# Altium PCB PCB1.PcbDoc (part 6 of 7)
Units mm, origin at the board's own origin, x right, y up, seen from the top; angles counter-clockwise.
Board outline 100 x 70 mm, 6 copper layers (Top Layer 1, GND_1, SIG, VCC, GND_2, Bottom Layer 1), stack 0.816 mm thick; 462 components, 328 nets, 2208 pads, 873 vias.
Unrouted connection lines stored in the file: 175.
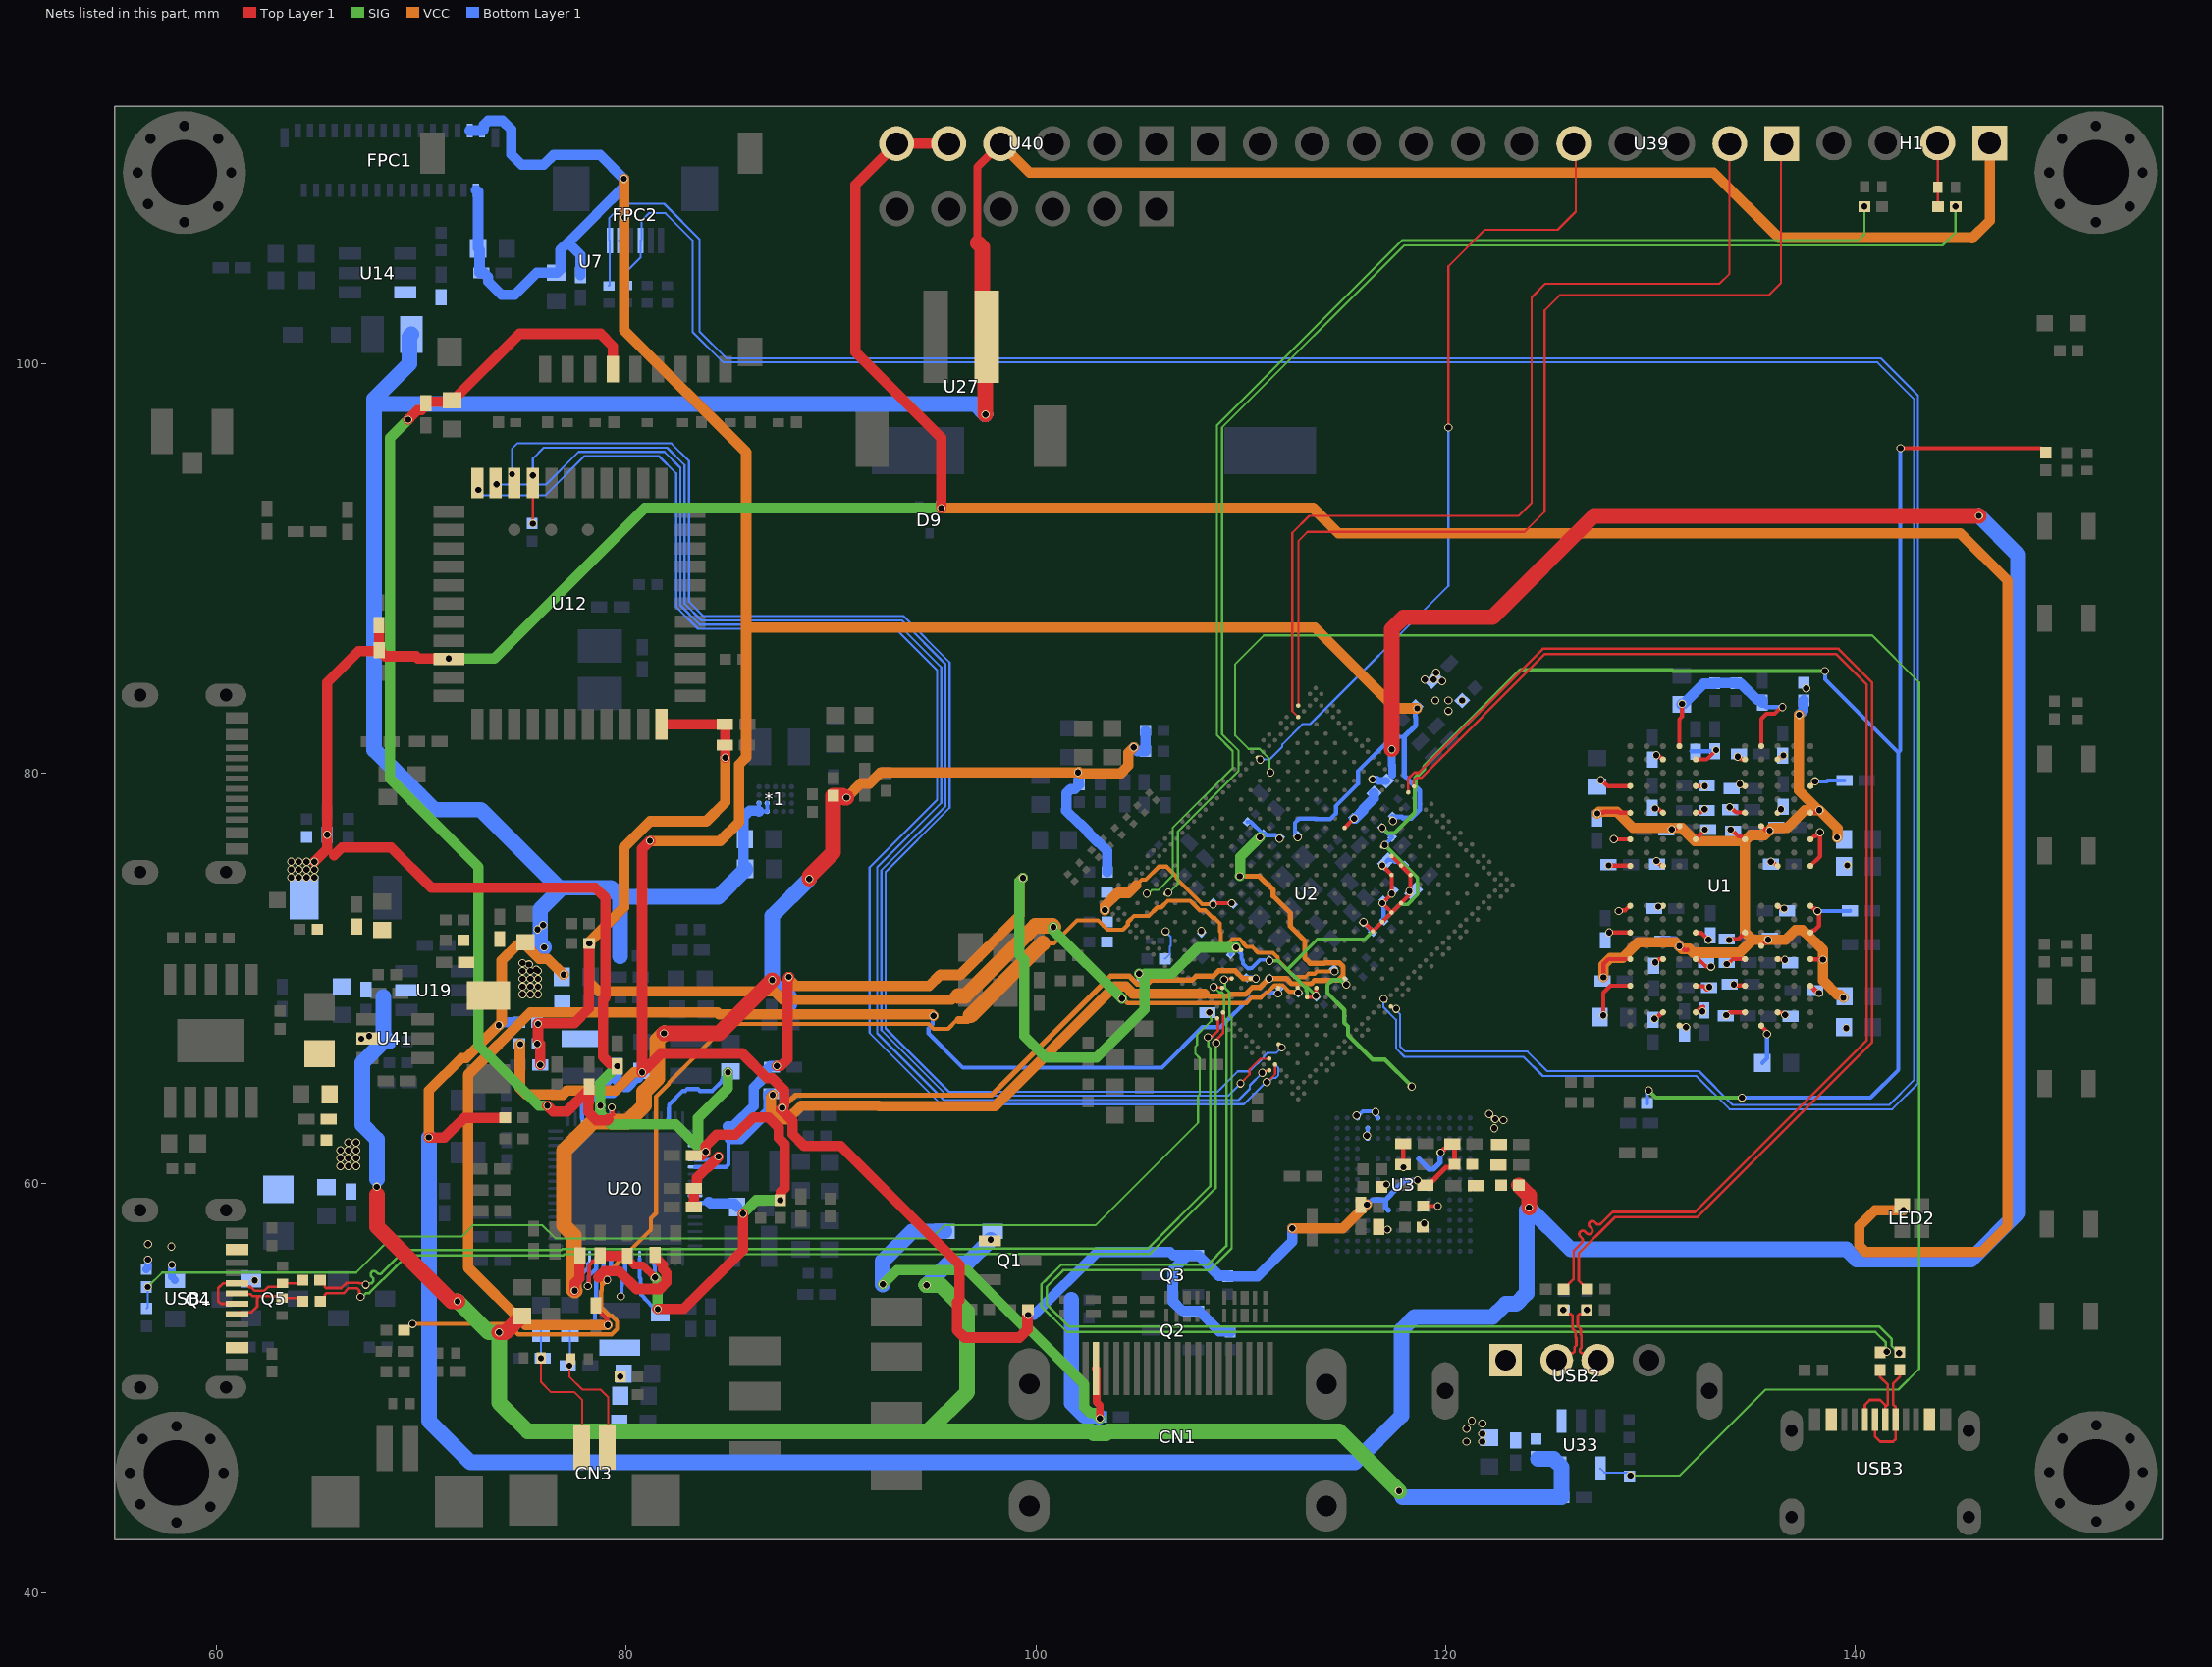
[diagram p10: the nets of this part, all layers, seen from the top]

## Via types
v1: diameter 0.4, hole 0.3, Top Layer 1 to Bottom Layer 1, tented both sides, 873 vias

## Nets (pads, with @x,y where several pads share a name; then routed paths per layer and width w, separated by ;. In a path a pad name is that pad's centre, name@x,y a point inside that pad or via, vN(x,y) a via of type N, cw(c..) or ccw(c..) an arc to the next point about the centre after c; other vN are vias at no path point) (continued)
SPI3_MOSI_M1: U2.AP12 U39.5 | length 39.2
  Top Layer 1 w0.102: U2.AP12@110.832,80.778 110.855,80.778 v1(110.949,80.684) ; v1(120.142,96.897) 120.142,104.775 121.92,106.553 125.476,106.553 126.365,107.442 126.365,110.66 U39.5@126.264,110.761
  Bottom Layer 1 w0.102: v1(110.949,80.684) 111.409,80.684 112.038,81.313 112.038,81.428 113.027,82.416 113.394,82.416 120.142,89.165 v1(120.142,96.897)
SPK_OUTN: C115.2 CN3.1 L9.1 U24.2 | length 7.2
  Top Layer 1 w0.102: v1(75.838,51.451) 75.838,50.273 76.327,49.784 77.47,49.784 77.851,49.403 77.851,47.134 CN3.1@77.819,47.102
  Bottom Layer 1 w0.102: L9.1@75.832,52.794 75.838,52.788 v1(75.838,51.451)
SPK_OUTP: C114.2 CN3.2 L8.1 U23.2 | length 7.5
  Top Layer 1 w0.102: U23.2@77.291,51.42 77.291,51.155 v1(77.218,51.082) 77.218,50.544 77.851,49.911 78.74,49.911 79.121,49.53 79.121,47.155 CN3.2@79.069,47.102
  Bottom Layer 1 w0.102: C114.2@77.15,51.071 77.162,51.082 v1(77.218,51.082) 77.25,51.114 L8.1@77.25,52.822
TP_INT_A: FPC2.4 U2.A22 U16.2 | length 134.1
  Bottom Layer 1 w0.102: U16.2@80.017,103.833 80.01,103.84 80.01,104.521 80.697,105.208 FPC2.4@80.697,106.031 80.756,106.089 80.756,107.013 81.106,107.363 81.916,107.363 83.236,106.044 83.236,101.571 84.731,100.076 141.097,100.076 142.875,98.298 142.875,65.024 141.657,63.806 134.038,63.806 132.378,65.466 124.966,65.466 124.011,66.421 118.032,66.421 117.789,66.664 117.789,68.23 117.591,68.428 v1(117.591,68.508)
TP_RST: FPC2.1 U2.B22 U15.2 | length 137.6
  Bottom Layer 1 w0.102: U15.2@79.145,103.82 79.197,103.871 FPC2.1@79.197,106.031 79.17,106.057 79.17,107.137 79.857,107.824 81.847,107.824 83.578,106.093 83.578,101.588 84.887,100.279 141.253,100.279 143.078,98.454 143.078,64.868 141.813,63.603 133.882,63.603 132.258,65.227 124.758,65.227 123.819,66.167 117.998,66.167 117.586,66.58 117.586,67.974 116.974,68.586 v1(116.974,68.989)
TSADC_SEUT_M0: R102.1 U2.1R20 | length 1.6
  Bottom Layer 1 w0.102: R102.1@106.301,70.95 106.313,70.95 106.533,71.169 106.533,71.531 106.584,71.583 106.584,72.035 106.338,72.281 v1(106.338,72.295)
TX: H1.2 R67.2 U42.2 | length 3.1
  Top Layer 1 w0.102: H1.2@144.042,110.791 144.042,107.696 R67.2@144.06,107.678
UART1_CTSN_M0: R11.1 U2.G37 U12.41 | length 72.2
  Top Layer 1 w0.102: v1(75.439,92.203) v1(75.439,94.562) ; v1(109.995,64.865) 110.436,65.307 110.436,65.552 110.955,66.07 U2.G37@111.398,66.07
  Bottom Layer 1 w0.102: v1(75.439,94.562) 75.438,95.377 75.971,95.91 81.994,95.91 82.844,95.06 82.844,88.303 83.673,87.475 93.456,87.475 95.586,85.344 95.586,78.407 92.456,75.276 92.456,67.472 95.666,64.262 109.392,64.262 v1(109.995,64.865)
UART1_RTSN_M0: U2.F37 U12.44 | length 74.2
  Top Layer 1 w0.102: v1(111.269,64.929) 111.293,64.929 111.681,65.317 U2.F37@111.681,65.787
  Bottom Layer 1 w0.102: v1(72.771,93.853) 73.042,93.582 76.039,93.582 77.962,95.504 81.587,95.504 82.438,94.653 82.438,88.135 83.505,87.068 93.148,87.068 95.18,85.036 95.18,78.715 91.882,75.417 91.882,67.331 95.362,63.851 110.162,63.851 111.241,64.929 111.35,64.929 111.551,65.13 111.714,65.13 111.842,65.258 111.842,65.628 111.684,65.785
UART1_RX_M0: U2.1C20 U12.42 | length 71.9
  Bottom Layer 1 w0.102: v1(74.422,94.615) 74.422,95.87 74.676,96.124 82.2,96.124 83.058,95.266 83.058,88.392 83.762,87.688 93.53,87.688 95.79,85.429 95.79,78.323 92.659,75.192 92.659,67.556 95.75,64.465 108.87,64.465 109.861,65.456 110.442,65.456 111.117,66.131 111.117,66.165 111.3,66.348 111.733,66.348 v1(112.005,66.619)
UART1_TX_M0: U2.F38 U12.43 | length 71
  Top Layer 1 w0.102: v1(111.051,65.381) 111.132,65.381 111.233,65.482 111.375,65.482 U2.F38@111.398,65.504
  Bottom Layer 1 w0.102: v1(73.66,94.132) 73.685,94.107 76.073,94.107 77.673,95.707 81.86,95.707 82.641,94.926 82.641,88.219 83.589,87.271 93.3,87.271 95.383,85.188 95.383,78.563 92.253,75.432 92.253,67.316 95.514,64.054 109.896,64.054 110.445,64.603 110.445,64.775 v1(111.051,65.381)
UART2_RX_M0_DEBUG: R68.1 U2.1V19 | length 62
  SIG w0.102: v1(105.415,74.137) 105.496,74.137 105.666,74.307 105.975,74.307 106.68,75.013 106.68,77.343 109.61,80.273 109.61,81.1 108.839,81.871 108.839,97.006 117.878,106.045 140.164,106.045 140.462,106.343 v1(140.462,107.696)
UART2_TX_M0_DEBUG: R67.1 U2.1U18 | length 65.5
  SIG w0.102: v1(106.47,74.186) 106.507,74.186 106.934,74.613 106.934,77.167 109.905,80.138 109.905,81.103 109.093,81.915 109.093,96.901 117.983,105.791 144.272,105.791 144.907,106.426 v1(144.907,107.696)
UART3_RX_M1: U2.AR4 U39.1 | length 49.4
  Top Layer 1 w0.102: U2.AR4@112.815,83.322 112.815,91.352 113.264,91.801 123.859,91.801 124.841,92.783 124.841,102.616 125.582,103.357 135.785,103.357 136.387,103.958 136.387,110.724 U39.1@136.424,110.761
UART3_TX_M1: U2.AP5 U39.2 | length 47.9
  Top Layer 1 w0.102: U2.AP5@112.815,82.756 112.522,83.05 112.522,91.756 113.349,92.583 123.571,92.583 124.206,93.218 124.206,103.251 124.88,103.925 133.389,103.925 133.872,104.408 133.872,110.748 U39.2@133.884,110.761
USB_H1_N: R121.2 USB3.5 USB3.7 | length 4.6
  Top Layer 1 w0.13: USB3.5@140.481,48.449 140.481,49.168 140.716,49.403 141.224,49.403 141.481,49.146 141.481,49.064 ; R121.2@141.231,50.869 141.231,50.522 141.603,50.15 141.603,49.185 141.481,49.064 ; USB3.7@141.481,48.449 141.481,49.064
USB_H1_P: R122.2 USB3.6 USB3.8 | length 5.6
  Top Layer 1 w0.102: USB3.6@140.97,48.438 USB3.6@140.981,48.449
  Top Layer 1 w0.13: USB3.6@140.97,48.438 140.97,47.625 141.224,47.371 141.859,47.371 141.981,47.493 USB3.8@141.981,48.449 141.981,49.064 141.859,49.185 141.859,50.206 142.185,50.532 R122.2@142.185,50.879
USB_H2_N: R77.2 U31.1 USB2.2 | length 3.5
  Top Layer 1 w0.13: USB2.2@125.434,51.348 125.832,51.348 126.184,51.7 126.23,51.7 126.306,51.775 126.306,51.989 126.39,52.072 126.39,52.448 126.352,52.485 126.352,52.747 126.205,52.895 126.205,53.527 126.129,53.603 125.956,53.603 v1(125.758,53.801)
USB_H2_P: R80.2 U32.2 USB2.3 | length 3.5
  Top Layer 1 w0.13: v1(126.905,53.808) 126.7,53.603 126.537,53.603 126.461,53.527 126.461,53.001 126.609,52.854 126.609,52.595 126.646,52.558 126.646,51.966 126.563,51.883 126.563,51.775 126.639,51.699 126.686,51.699 127.037,51.348 USB2.3@127.434,51.348
USB_HOST1_N: R121.1 U2.1J20 | length 66.8
  Top Layer 1 w0.13: v1(108.678,69.585) 108.711,69.552 109.082,69.552 U2.1J20@109.1,69.535
  SIG w0.119: v1(108.678,69.585) 108.95,69.314 109.085,69.314 109.187,69.212 109.187,68.074 109.302,67.959 109.302,56.926 108.377,56.001 101.464,56.001 101.453,56.012 101.239,56.012 100.478,55.251 100.468,55.251 100.269,55.052 100.269,53.978 101.517,52.73 140.994,52.73 141.512,52.212 141.512,51.815 v1(141.553,51.774)
USB_HOST1_P: R122.1 U2.1J19 | length 67.1
  Top Layer 1 w0.13: v1(109.186,69.937) 109.226,69.977 109.542,69.977 U2.1J19@109.559,69.995
  SIG w0.119: v1(109.186,69.937) 109.24,69.884 109.24,69.525 109.446,69.319 109.446,68.181 109.561,68.066 109.561,56.818 108.484,55.742 101.335,55.742 100.528,54.935 100.528,54.085 101.625,52.988 141.101,52.988 141.104,52.986 141.197,52.986 141.787,52.396 141.787,52.055 v1(142.149,51.692)
USB_HOST2_N: R76.1 U2.V1 | length 64.8
  Top Layer 1 w0.13: U2.V1@118.469,79.364 118.452,79.381 118.452,79.445 118.436,79.461 118.436,79.64 118.582,79.786 118.808,79.786 124.857,85.835 139.079,85.835 140.572,84.342 140.572,66.972 132.19,58.589 128.163,58.589 127.878,58.304 127.597,58.023 cw(c127.479,58.141) 127.362,58.023 127.289,58.095 ccw(c127.171,57.978) 127.054,58.095 ccw(c127.171,57.978) 127.054,57.86 127.126,57.788 cw(c127.009,57.67) 127.126,57.552 cw(c127.009,57.67) 126.891,57.552 126.819,57.625 ccw(c126.701,57.507) 126.583,57.625 ccw(c126.701,57.507) 126.583,57.39 126.656,57.317 cw(c126.538,57.199) 126.656,57.082 126.339,56.765 126.252,56.678 126.252,55.298 R76.1@125.765,54.811
USB_HOST2_P: R79.1 U2.V2 | length 64.7
  Top Layer 1 w0.13: U2.V2@118.186,79.081 118.179,79.087 118.179,79.746 118.476,80.043 118.701,80.043 124.751,86.092 139.186,86.092 140.829,84.449 140.829,66.865 132.296,58.332 128.269,58.332 128.059,58.123 126.509,56.572 126.509,55.24 R79.1@126.925,54.824
USB_HOST_PWREN_H: R82.2 U2.1V6 U33.4 | length 92.6
  SIG w0.102: v1(111.456,80.05) 111.401,80.105 111.401,80.73 110.924,81.208 110.381,81.208 109.734,81.854 109.734,85.35 111.125,86.741 140.843,86.741 143.134,84.45 143.134,50.932 142.113,49.911 135.636,49.911 131.445,45.72 v1(129.032,45.72)
  Bottom Layer 1 w0.102: U33.4@127.571,46.061 127.765,45.867 128.885,45.867 v1(129.032,45.72)
USB_OTG0_N: R70.2 U2.R38 | length 54.9
  Top Layer 1 w0.13: R70.2@65.048,55.251 65.061,55.251 65.266,55.046 65.266,54.95 65.342,54.874 66.082,54.874 66.328,55.12 66.949,55.12 66.969,55.1 67.212,55.1 v1(67.275,55.036) ; v1(108.395,67.121) 108.447,67.173 108.614,67.173 108.885,67.444 108.885,67.953 108.869,67.969 108.869,68.033 U2.R38@108.852,68.05
  SIG w0.119: v1(67.275,55.036) 67.348,55.109 67.564,55.109 67.606,55.152 ccw(c67.492,55.266) 67.606,55.38 67.564,55.422 cw(c67.678,55.536) 67.564,55.65 cw(c67.678,55.536) 67.792,55.65 67.834,55.608 ccw(c67.948,55.722) 68.062,55.608 68.569,56.115 69.191,56.736 76.826,56.736 76.876,56.786 97.152,56.786 97.162,56.796 105.455,56.796 108.518,59.858 108.518,66.586 108.415,66.689 108.415,67.101 v1(108.395,67.121)
USB_OTG0_P: R71.2 U2.R37 | length 55.3
  Top Layer 1 w0.13: R71.2@65.061,54.228 65.073,54.228 65.278,54.434 65.278,54.542 65.354,54.618 66.189,54.618 66.434,54.863 66.843,54.863 66.958,54.748 66.958,54.506 v1(67.022,54.442) ; v1(108.81,66.839) 108.862,66.891 108.862,67.058 109.141,67.338 109.141,68.327 U2.R37@109.135,68.333
  SIG w0.119: v1(67.022,54.442) 67.125,54.442 67.308,54.625 67.446,54.625 68.752,55.932 69.298,56.477 76.934,56.477 76.983,56.527 97.259,56.527 97.269,56.537 105.563,56.537 108.776,59.751 108.776,66.806 v1(108.81,66.839)
USB_OTG0_VBUSDET: C173.1 R75.1 R78.2 U2.T38 | length 62.1
  SIG w0.102: v1(56.634,54.927) 57.333,55.626 66.809,55.626 68.566,57.383 71.959,57.383 72.509,57.933 75.903,57.933 76.533,57.302 94.898,57.302 95.528,57.933 102.905,57.933 107.919,62.947 107.919,64.266 108.001,64.348 108.001,66.094 107.783,66.311 107.783,66.658 107.87,66.745 107.87,67.23 108.564,67.924 108.564,68.026 108.529,68.061 108.529,68.27 v1(108.472,68.327)
  Bottom Layer 1 w0.102: R78.2@56.575,53.876 56.634,53.935 v1(56.634,54.927)
USB_OTG_D_N: R70.1 U30.2 USB1.5 USB1.7 | length 6.2
  Top Layer 1 w0.102: USB1.7@60.997,54.102 USB1.7@61,54.105
  Top Layer 1 w0.13: USB1.7@60.997,54.102 60.198,54.102 60.071,54.229 60.071,54.864 60.312,55.105 61.4,55.105 61.584,54.921 61.665,54.921 61.85,54.737 62.321,54.737 62.519,54.935 63.041,54.935 U30.2@63.201,55.095 64.027,55.095 R70.1@64.182,55.251
USB_OTG_D_P: R71.1 U29.2 USB1.6 USB1.8 | length 5.1
  Top Layer 1 w0.102: USB1.6@61,54.605 USB1.6@61.05,54.555
  Top Layer 1 w0.13: USB1.8@61,53.605 61.085,53.69 61.691,53.69 61.976,53.975 61.976,54.356 62.1,54.48 ; USB1.6@61,54.605 61.05,54.605 61.08,54.575 61.648,54.575 61.743,54.48 62.1,54.48 ; R71.1@64.195,54.228 64.044,54.379 U29.2@63.191,54.379 63.088,54.483 62.43,54.483 62.427,54.48 62.1,54.48
VCC1V8_DDR: C150.2 C151.2 C152.2 C153.2 C154.2 C155.2 C156.2 C157.2 R63.1 U1.F1 U1.F12 U1.G4 U1.G9 U1.T4 U1.T9 U1.U1 U1.U12 | length 47.9
  Top Layer 1 w0.203: v1(127.42,78.054) 127.457,78.091 127.702,78.091 127.747,78.137 128.44,78.137 128.49,78.087 U1.F1@129.024,78.087 ; v1(127.719,70.05) 127.719,70.696 127.956,70.933 129.02,70.933 U1.U1@129.024,70.937 ; v1(131.046,77.278) 131.084,77.316 131.277,77.316 131.397,77.437 U1.G4@131.424,77.437 ; v1(131.425,71.569) 131.425,71.586 U1.T4@131.424,71.587 131.45,71.587 131.654,71.383 131.821,71.383 ; U1.T9@135.424,71.587 135.45,71.587 135.636,71.773 135.735,71.773 v1@135.745,71.783 ; U1.G9@135.424,77.437 135.45,77.437 135.638,77.249 135.795,77.249 v1(135.833,77.211) ; U1.U12@137.824,70.937 137.841,70.919 138.422,70.919 v1(138.432,70.91) ; U1.F12@137.824,78.087 137.842,78.105 138.097,78.105 138.206,78.215 v1(138.26,78.215)
  VCC w0.508: v1(127.42,78.054) 127.503,78.137 128.365,78.137 129.154,77.348 130.977,77.348 v1(131.046,77.278) ; v1(127.719,70.05) 127.719,70.653 128.06,70.993 128.651,70.993 129.412,71.754 130.823,71.754 130.829,71.759 131.234,71.759 v1(131.425,71.569) 131.556,71.438 131.908,71.438 132.098,71.247 134.366,71.247 135.001,71.882 ; v1@131.172,77.348 131.545,77.348 132.185,76.708 134.62,76.708 ; v1@135.757,71.882 135.001,71.882 ; v1(135.757,71.883) 136.618,71.883 137.099,72.365 137.42,72.365 137.542,72.243 137.579,72.243 138.432,71.39 v1(138.432,70.91) 138.432,69.9 139.128,69.204 139.278,69.204 v1(139.434,69.048) ; v1@135.815,77.229 135.928,77.342 136.682,77.342 137.555,78.215 v1(138.26,78.215) 139.151,77.323 139.151,76.902 v1(139.123,76.874) ; v1(135.833,77.211) 135.797,77.211 135.584,76.999 134.911,76.999 134.62,76.708 ; v1(137.272,82.867) 137.252,82.847 137.252,79.174 v1@138.211,78.215 ; 134.62,76.708 134.62,74.539 134.614,74.533 134.614,72.269 135.001,71.882
  Bottom Layer 1 w0.508: C155.2@130.599,71.812 130.615,71.796 131.197,71.796 v1(131.425,71.569) ; v1(137.272,82.867) 137.485,83.08 137.485,83.555 R63.1@137.501,83.571
VCC3V3_PMU: C110.1 C221.2 C230.2 R34.2 R35.2 R46.2 R57.2 R87.2 R98.2 R99.2 R100.2 R101.2 U2.1N15 U2.1P16 U20.31 | length 69.3
  Top Layer 1 w0.203: U2.1P16@108.64,73.672 U2.1P16@108.648,73.663 ; U2.1P16@108.645,73.666 108.645,73.669 108.648,73.672 U2.1N15@109.559,73.672 v1(109.563,73.67)
  Top Layer 1 w0.508: v1(77.481,54.742) 77.481,55.106 77.72,55.345 77.72,56.455 C110.1@77.736,56.471
  Top Layer 1 w0.762: v1(81.843,67.311) 84.521,67.311 v1(87.122,69.912) ; v1(88.931,74.854) 88.931,74.974 90.103,76.146 R57.2@90.103,78.919 90.544,78.919 90.646,78.817 v1(90.749,78.817)
  VCC w0.203: 104.902,74.549 105.172,74.819 105.371,74.819 106.002,75.449 106.382,75.449 106.883,74.948 106.883,74.866 108.126,73.623 108.625,73.623 v1(108.648,73.599)
  VCC w0.508: v1(90.749,78.817) 91.449,79.518 91.889,79.518 92.422,80.05 v1(102.056,80.05) ; v1@102.092,80.086 102.163,80.016 104.146,80.016 104.521,80.391 104.521,81.013 v1(104.782,81.274) ; v1(103.365,73.332) 103.365,73.535 103.997,74.168 104.521,74.168 104.902,74.549
  VCC w0.762: v1(77.481,54.742) 77.444,54.78 77.444,57.43 76.962,57.912 76.962,61.595 78.359,62.992 80.072,62.992 80.871,63.792 80.871,64.463 81.509,65.1 81.509,66.976 v1(81.843,67.311)
  Bottom Layer 1 w0.203: v1(77.481,54.742) 77.481,54.795 77.619,54.933 77.619,55.349 78.13,55.86 U20.31@78.13,56.066
  Bottom Layer 1 w0.508: v1(102.056,80.05) 102.102,80.005 102.102,79.486 R87.2@102.118,79.47 102.118,79.457 101.903,79.243 101.7,79.243 101.492,79.035 101.492,78.251 101.473,78.232 101.473,78.193 102.109,77.557 102.15,77.557 102.582,77.126 102.582,77.079 103.013,76.647 103.06,76.647 103.48,76.226 R98.2@103.48,75.194 ; v1(104.782,81.274) 104.956,81.1 105.34,81.1 R34.2@105.356,81.084 ; R34.2@105.356,81.133 R35.2@105.356,82.102
  Bottom Layer 1 w0.762: v1@87.122,69.778 87.42,69.48 87.588,69.48 87.971,69.097 R46.2@87.971,68.727 ; v1@87.122,69.85 87.122,73.044 v1(88.931,74.854)
VCC3V3_SD: C82.2 C190.2 C191.2 U7.4 U20.58 | length 56.8
  Top Layer 1 w0.203: 79.121,63.119 79.34,63.338 79.321,63.357 79.321,63.66 v1(79.283,63.698)
  Top Layer 1 w0.508: v1(69.342,97.282) 69.589,97.529 69.589,97.539 69.797,97.747 70,97.747 70.214,97.961 C191.2@70.214,98.086 70.214,98.141 70.23,98.157 71.417,98.157 C190.2@71.487,98.227 71.537,98.227 74.783,101.473 78.74,101.473 79.346,100.867 U7.4@79.346,99.743 ; v1(76.141,63.781) 76.422,63.5 77.102,63.5 C82.2@78.17,64.568 ; C82.2@78.186,64.709 78.186,64.584 C82.2@78.17,64.568 ; 79.121,63.119 79.07,63.068 78.537,63.068 78.143,63.462 78.143,63.883 78.17,63.91 C82.2@78.17,64.568
  SIG w0.508: v1(69.342,97.282) 68.453,96.393 68.453,79.756 72.771,75.438 72.771,66.729 75.719,63.781 v1(76.141,63.781)
  Bottom Layer 1 w0.203: U20.58@79.252,63.141 79.268,63.157 79.268,63.683 v1(79.283,63.698)
VCC3V3_SYS: C46.2 C47.2 C64.2 C65.2 C66.2 C72.1 C80.2 C83.1 C84.2 C86.1 C96.1 C101.2 C107.1 D9.2 L2.2 LED2.2 R39.2 R40.2 R95.2 U12.9 U20.4 U20.10 U20.11 U20.22 U20.24 U20.30 U20.54 U20.57 U20.66 U40.5 U40.6 | length 242
  Top Layer 1 w0.203: v1(78.126,54.966) 78.164,55.003 78.164,55.142 78.177,55.156 78.177,55.96 78.209,55.992 78.209,56.005 78.387,56.183 78.551,56.183 78.719,56.351 C107.1@78.719,56.476
  Top Layer 1 w0.381: C96.1@80.05,56.45 80.05,56.325 80.396,55.979 80.807,55.979 v1(81.402,55.383)
  Top Layer 1 w0.508: v1(64.77,75.692) 65.395,76.317 v1(65.395,77.009) 65.395,84.445 66.929,85.979 C46.2@67.928,85.979 ; 65.722,76.009 66.103,76.39 68.517,76.39 70.485,74.422 78.486,74.422 78.994,73.914 78.994,69.088 78.867,68.961 78.867,66.167 79.186,65.848 79.541,65.848 79.557,65.832 v1(79.557,65.707) ; C47.2@67.927,87.252 67.927,86.124 C46.2@67.983,86.068 ; C46.2@67.928,86.014 C46.2@67.928,85.979 ; U12.9@71.34,85.601 v1(71.322,85.62) 69.828,85.62 69.723,85.725 68.217,85.725 68.069,85.873 67.944,85.873 67.928,85.889 C46.2@67.928,85.979 ; C107.1@78.735,56.45 C96.1@80.05,56.45 ; v1(81.534,53.848) 82.804,53.848 85.694,56.738 v1(85.694,58.509) ; C83.1@83.309,61.346 83.325,61.362 83.715,61.362 v1(83.881,61.528) ; v1@83.879,61.515 83.879,61.82 84.415,62.357 85.344,62.357 86.193,63.206 86.949,63.206 87.442,62.713 87.442,62.191 87.734,61.899 87.734,59.747 87.54,59.552 87.54,59.182 v1(87.524,59.166) ; v1(95.377,92.964) 95.377,96.393 91.186,100.584 91.186,108.745 U40.6@93.202,110.761 U40.5@95.742,110.761
  SIG w0.508: v1(71.322,85.62) 73.555,85.62 80.899,92.964 v1(95.377,92.964) ; v1@78.728,63.773 78.728,64.877 v1(79.557,65.707) ; v1(78.732,63.773) 78.728,63.768 78.728,63.385 79.248,62.865 82.404,62.865 83.504,61.765 ; v1(81.402,55.383) 81.534,55.251 v1(81.534,53.848) ; v1(83.881,61.528) 83.741,61.528 83.504,61.765 ; v1(84.963,65.405) 84.963,64.643 83.504,63.184 83.504,61.765 ; v1(85.694,58.509) 86.351,59.166 v1(87.524,59.166)
  VCC w0.508: v1(95.377,92.964) 113.538,92.964 114.769,91.733 145.137,91.733 147.447,89.422 147.447,57.912 146.177,56.642 140.506,56.642 140.208,56.94 140.208,57.912 140.97,58.674 v1(142.367,58.674)
  Bottom Layer 1 w0.203: U20.54@77.852,63.141 77.835,63.159 77.835,64.415 77.975,64.554 78.778,64.554 78.867,64.643 78.934,64.643 79.328,65.037 79.534,65.037 ; v1(78.126,54.966) 78.164,55.003 78.164,55.45 78.526,55.811 78.526,56.3 U20.30@78.552,56.327 ; v1(78.732,63.773) 78.732,63.72 78.876,63.576 78.876,63.168 U20.57@78.902,63.141 ; U20.24@80.652,56.327 80.652,55.384 80.694,55.341 80.694,55.045 80.739,55 80.739,54.535 80.884,54.39 80.884,54.362 81.398,53.848 v1(81.534,53.848) ; U20.22@81.352,56.327 81.379,56.3 81.379,56.005 81.398,55.986 81.398,55.388 v1(81.402,55.383) ; U20.66@82.052,63.141 82.079,63.168 82.079,63.648 82.089,63.658 82.089,63.829 82.762,64.502 82.885,64.502 82.974,64.591 83.5,64.591 83.589,64.502 84.192,64.502 84.663,64.973 84.663,65.024 84.743,65.105 84.743,65.155 85.042,65.453 C80.2@85.092,65.453 ; U20.10@83.36,59.384 U20.11@83.36,59.034 83.979,59.034 84.031,59.085 ; U20.4@83.36,61.484 83.382,61.506 83.859,61.506 v1(83.881,61.528)
  Bottom Layer 1 w0.508: 79.534,65.037 C86.1@79.534,65.707 ; 84.031,59.085 84.111,59.005 85.263,59.005 85.409,58.859 C84.2@85.409,58.833
  other v1: 63.627,74.93 64.008,74.93 64.389,74.93 64.77,74.93 63.627,75.311 64.008,75.311 64.389,75.311 64.77,75.311 63.627,75.692 64.008,75.692 64.389,75.692
VCC5V0_SYS: *1.D1 *1.D2 *1.E1 *1.E2 C56.2 C67.2 C68.2 C121.2 C122.2 C168.2 C169.2 C170.2 C241.2 C242.2 C243.2 D7.2 F1.2 H1.1 L10.1 L11.2 Q1.1 R41.1 R52.2 R81.1 R109.2 U13.1 U14.6 U19.5 U27.2 U33.5 U40.4 | length 246.2
  Top Layer 1 w0.381: 97.155,105.918 97.14,105.933 97.14,109.619 U40.4@98.282,110.761
  Top Layer 1 w0.762: 67.818,59.436 67.818,57.875 71.464,54.229 v1(71.755,54.229) ; v1(73.787,52.705) 74.092,52.705 74.894,53.508 L10.1@74.926,53.508 ; 97.155,105.918 97.389,105.684 97.389,101.358 97.536,101.211 v1(97.536,97.536)
  SIG w0.762: v1(71.755,54.229) 73.279,52.705 v1(73.787,52.705) 73.787,49.276 75.184,47.879 94.742,47.879 ; v1(94.659,55.011) 95.353,55.011 96.647,53.717 96.647,49.784 94.742,47.879 ; v1(117.729,44.958) 114.808,47.879 103.531,47.879 103.429,47.777 102.819,47.777 102.717,47.879 94.742,47.879
  VCC w0.508: U40.4@98.282,110.761 99.696,109.347 133.096,109.347 136.271,106.172 145.669,106.172 145.713,106.128 146.582,106.998 H1.1@146.582,110.791
  Bottom Layer 1 w0.203: *1.E1@86.476,78.149 *1.D1@86.876,78.149 86.883,78.157 *1.D2@86.883,78.542 ; *1.E1@86.476,78.182 *1.E2@86.476,78.549
  Bottom Layer 1 w0.508: C122.2@85.805,75.35 85.725,75.43 85.725,77.884 86.023,78.182 86.443,78.182 *1.E1@86.476,78.149
  Bottom Layer 1 w0.762: 67.818,60.198 67.818,62.137 67.114,62.841 67.114,65.885 68.15,66.921 68.414,66.921 R41.1@68.416,66.92 68.135,67.2 68.135,69.088 ; U13.1@69.507,101.442 69.4,101.334 69.4,100.007 67.691,98.298 ; v1(75.985,71.508) 75.797,71.695 75.797,73.369 76.85,74.422 79.248,74.422 79.695,73.976 ; 76.775,74.347 72.891,78.232 70.612,78.232 67.691,81.153 67.691,98.298 ; R52.2@79.695,71.086 79.695,73.976 ; C122.2@85.805,75.35 85.805,75.3 84.481,73.976 79.695,73.976 ; v1(94.659,55.011) 95.718,56.07 96.634,56.07 v1(97.793,57.229) ; v1(97.536,97.536) 97.028,98.044 67.945,98.044 67.691,98.298 ; 117.907,44.653 C170.2@125.668,44.653 125.67,44.655 125.67,46.06 U33.5@125.671,46.061 125.671,46.132 125.279,46.525 R81.1@124.509,46.525
  other v1: 67.818,59.817 74.93,69.215 75.311,69.215 75.692,69.215 74.93,69.596 75.311,69.596 75.692,69.596 74.93,69.977 75.311,69.977 75.692,69.977 74.93,70.358 75.311,70.358 75.692,70.358 75.598,70.419 75.246,70.674 74.93,70.739 75.665,72.389 75.937,72.597
VCC5V0_USB_HOST: USB2.1 USB3.2 USB3.11
VCC5V0_USB_OTG: C171.2 C172.2 Q4.2 Q5.2 R75.2 R81.2 U33.1 USB1.2 USB1.11 | length 1.3
  Bottom Layer 1 w0.381: R75.2@56.563,55.793 56.642,55.872 v1(56.642,56.261) ; v1(57.808,56.003) 57.812,56 57.812,55.414 Q4.2@57.958,55.267
  other v1: 121.031,47.371 121.793,47.371 121.793,47.752 121.031,48.006 121.793,48.26 121.285,48.387 61.862,55.243 57.785,56.896 56.642,57.023
VCC5V_HDMI_TX: C250.2 CN1.18 D7.1 R18.1 R20.1 | length 28.5
  Top Layer 1 w0.381: CN1.18@102.929,50.948 102.97,50.907 102.97,49.303 103.124,49.149 v1(103.124,48.514)
  SIG w0.508: v1(92.524,55.047) 93.224,55.747 96.651,55.747 99.439,52.959 99.574,52.959 102.362,50.172 102.362,49.066 102.66,48.768 102.87,48.768 v1(103.124,48.514)
  Bottom Layer 1 w0.762: v1(92.524,55.047) 92.524,56.202 93.963,57.641 95.534,57.641 D7.1@95.54,57.647 ; R20.1@101.732,54.303 101.732,49.271 102.362,48.641 103.052,48.641 103.066,48.627 C250.2@103.066,48.587
VCC12V_DCIN: C244.2 C245.2 F2.2 R110.1 U41.5
  other v1: 66.04,60.833 66.421,60.833 66.802,60.833 66.04,61.214 66.421,61.214 66.802,61.214 66.04,61.595 66.421,61.595 66.802,61.595 66.421,61.976 66.802,61.976 67.056,67.056 67.443,67.18
VCC_1V8: C92.2 C93.2 L6.2 R49.1 R59.1 R86.1 R107.1 | length 198.6
  Top Layer 1 w0.508: v1(70.358,62.23) 71.12,62.23 72.076,63.186 R49.1@74.088,63.186
  Top Layer 1 w0.762: v1(117.375,81.184) 117.375,87.049 117.955,87.63 122.301,87.63 127.254,92.583 v1(146.05,92.583) ; R86.1@123.581,59.896 124.079,59.398 v1(124.079,58.801)
  VCC w0.508: v1(70.358,62.23) 70.358,64.516 71.953,66.111 72.179,66.111 73.914,67.846 73.914,70.866 74.667,71.619 75.088,71.619 75.754,70.952 76.158,70.952 v1(76.933,70.178)
  Bottom Layer 1 w0.381: v1(116.435,79.713) v1(116.435,79.713) 116.636,79.714 116.716,79.634 117.109,79.634 R107.1@117.118,79.643 ; v1(117.375,81.184) 117.378,81.181 117.378,80.413 117.39,80.401 117.39,79.925
  Bottom Layer 1 w0.508: v1(73.775,67.706) 73.916,67.848 R59.1@74.774,67.848
  Bottom Layer 1 w0.762: v1(70.358,62.23) 70.358,48.387 72.39,46.355 115.57,46.355 117.856,48.641 117.856,52.832 118.491,53.467 122.301,53.467 122.936,54.102 123.444,54.102 123.96,54.618 123.96,58.682 v1(124.079,58.801) 126.111,56.769 139.573,56.769 140.081,56.261 145.669,56.261 147.955,58.547 147.955,90.678 v1(146.05,92.583)
VCC_3V3: C57.2 C58.2 C59.2 C60.2 C85.2 C165.2 C166.2 C167.2 C196.1 C204.2 C237.1 FPC1.29 FPC1.30 FPC1.31 FPC2.2 Q2.1 Q3.1 R17.2 R19.2 R21.2 R60.1 R88.1 R108.1 U2.1H18 U2.1J2 U2.1N8 U3.E6 U3.F5 U3.J10 U3.K9 U20.55 | length 232.4
  Top Layer 1 w0.203: U2.1J2@117.376,77.806 117.376,77.8 117.392,77.784 117.392,77.72 v1(117.43,77.682)
  Top Layer 1 w0.254: C165.2@119.023,59.891 119.148,59.891 120.026,60.769 120.297,60.769 R88.1@120.44,60.912 120.44,61.797 C167.2@120.326,61.91 120.201,61.91 119.776,61.486 v1(119.768,61.486)
  Top Layer 1 w0.508: v1(81.153,76.708) 80.772,76.327 v1(80.772,65.405) 81.698,66.331 85.659,66.331 86.876,65.114 87.126,65.114 87.705,64.534 87.705,63.767 v1(87.613,63.675) ; v1@87.548,63.602 88.115,63.034 88.115,62.38 88.683,61.812 90.461,61.812 96.266,56.007 96.266,54.297 96.139,54.17 96.139,52.832 96.52,52.451 99.187,52.451 99.588,52.852 99.588,53.805 R17.2@99.646,53.805
  VCC w0.254: v1(87.613,63.675) 87.657,63.718 87.665,63.718 88.102,64.156 88.133,64.156 88.267,64.289 97.83,64.289 103.643,70.102 104.571,70.102 104.942,69.73 105.456,69.73 105.647,69.921 107.64,69.921 107.823,70.104 108.648,70.104 108.91,70.366 109.735,70.366 110.113,69.988 v1(110.734,69.988)
  VCC w0.508: v1(74.823,66.792) 74.803,66.772 74.803,64.634 75.101,64.337 76.372,64.337 76.401,64.308 76.894,64.308 77.103,64.516 79.494,64.516 80.383,65.405 v1(80.772,65.405) ; v1(79.886,109.045) 79.886,101.66 85.852,95.694 85.852,87.12 ; v1(81.153,76.708) 84.582,76.708 85.496,77.622 85.496,80.442 85.852,80.798 85.852,87.12 ; v1(112.522,57.785) 114.996,57.785 v1(116.165,58.954) ; v1(118.618,83.185) 117.563,83.185 113.627,87.12 85.852,87.12
  Bottom Layer 1 w0.203: U20.55@78.202,63.141 78.229,63.168 78.229,63.463 78.246,63.48 78.246,64.072 78.385,64.072 78.474,64.161 78.613,64.161 78.702,64.25 79.393,64.25 79.773,64.629 79.899,64.629 ; FPC2.2@79.697,106.031 79.742,106.076 79.742,106.96 79.922,107.14 v1(79.922,107.154) ; v1(112.78,76.887) 112.649,77.018 112.649,77.593 112.858,77.802 113.608,77.802 113.632,77.778 114.382,77.778 114.651,78.047 114.651,78.415 115.73,79.494 115.73,80.109 117.208,81.587 117.345,81.587 117.545,81.788 117.983,81.788
  Bottom Layer 1 w0.254: C204.2@110.292,70.02 110.307,70.005 110.717,70.005 v1(110.734,69.988) ; v1(116.165,58.954) 116.204,58.954 116.429,59.179 116.843,59.179 116.862,59.16 117.072,59.16 ; U3.E6@117.204,58.679 117.072,58.811 117.072,59.16 ; C196.1@117.417,77.902 117.432,77.886 117.864,77.886 117.924,77.826 118.339,77.826 118.745,78.232 118.745,79.151 117.983,79.913 117.983,81.788 118.545,82.35 118.545,82.74 118.529,82.756 118.529,83.096 v1(118.618,83.185) ; v1(118.629,60.138) 118.023,60.138 117.336,59.451 117.336,59.424 117.072,59.16 ; U3.K9@118.704,61.179 U3.J10@119.204,60.679 119.415,60.679 119.74,61.004 119.74,61.458 v1(119.768,61.486)
  Bottom Layer 1 w0.381: 79.899,64.629 80.074,64.629 C85.2@80.59,65.145
  Bottom Layer 1 w0.508: FPC1.29@72.354,111.398 FPC1.31@72.954,111.398 72.978,111.398 73.049,111.469 73.049,111.67 73.257,111.878 73.951,111.878 74.38,111.45 74.38,110.231 74.881,109.729 75.968,109.729 76.457,110.218 78.712,110.218 v1(79.886,109.045) 79.886,108.66 78.552,107.327 78.552,107.308 77.162,105.918 ; FPC1.30@72.654,108.492 72.687,108.492 72.764,108.415 C59.2@72.764,105.648 72.837,105.575 72.837,104.461 72.853,104.445 C60.2@72.91,104.445 73.035,104.445 73.25,104.231 73.25,104.028 73.899,103.378 74.549,103.378 75.633,104.462 C57.2@76.574,104.462 76.624,104.462 76.77,104.608 76.77,105.555 77.133,105.918 77.162,105.918 ; C58.2@77.756,104.334 77.756,105.324 77.162,105.918 ; C85.2@80.59,65.145 C85.2@80.59,65.334 ; v1(99.626,53.558) 99.913,53.558 102.997,56.642 106.553,56.642 106.717,56.478 Q3.1@107.664,56.478 ; R19.2@109.487,52.727 109.487,52.74 109.471,52.756 108.958,52.756 107.962,53.752 Q2.1@107.693,53.752 107.681,53.764 107.145,53.764 106.682,54.227 106.682,55.741 107.407,56.466 Q3.1@107.676,56.466 107.945,56.466 108.939,55.473 109.358,55.473 109.374,55.457 R21.2@109.374,55.444 110.816,55.444 112.522,57.15 v1(112.522,57.785)
VCC_DDR: C1.2 C2.2 C3.2 C4.2 C5.2 C6.2 C7.2 C8.2 C9.2 C10.2 C11.2 C12.2 C13.2 C14.2 C15.2 C16.2 C17.2 C18.2 C19.2 C20.2 C21.2 C22.2 C23.2 C24.2 C25.2 C26.2 C27.2 C28.2 C29.2 C30.2 C31.2 C32.2 C33.2 C34.2 C35.2 C36.2 C37.2 C38.2 C39.2 C40.2 C41.2 C42.2 C105.2 C106.2 C180.2 C181.2 C182.2 C183.2 C184.2 C185.2 C186.2 C187.2 C188.2 C189.2 L7.1 R54.2 R61.2 R62.2 R97.2 U1.A4 U1.A9 U1.AA3 U1.AA5 U1.AA8 U1.AA10 U1.AB4 U1.AB9 U1.B3 U1.B5 U1.B8 U1.B10 U1.D1 U1.D5 U1.D8 U1.D12 U1.F3 U1.F5 U1.F8 U1.F10 U1.H1 U1.H5 U1.H8 U1.H12 U1.K1 U1.K3 U1.K10 U1.K12 U1.N1 U1.N3 U1.N10 U1.N12 U1.R1 U1.R5 U1.R8 U1.R12 U1.U3 U1.U5 U1.U8 U1.U10 U1.W1 U1.W5 U1.W8 U1.W12 U2.1D5 U2.1D6 U2.1D7 U2.1D8 U2.1D9 U2.1E4 U2.1E6 U2.1E7 U2.1E9 U2.1F4 U2.1F5 U2.1G4 U2.1G5 U20.26 | length 58.9
  Top Layer 1 w0.203: v1(115.998,72.751) 116,72.751 116.237,72.514 116.245,72.514 116.463,72.296 U2.1D8@116.917,72.751 ; U2.1D8@116.917,72.753 U2.1D8@116.917,72.751 ; v1(116.917,75.508) 117.376,75.049 v1(117.376,74.129) v1(116.917,73.67) 116.917,73.668 U2.1D7@117.373,73.212 ; U2.1G4@117.376,75.968 118.296,75.049 118.289,75.043 118.289,74.273 118.296,74.266 118.268,74.239 U2.1D5@118.268,74.155 ; v1(118.241,74.249) 118.266,74.225 118.266,74.162 118.289,74.139 U2.1D5@118.287,74.137 ; U2.1D5@118.292,74.131 U2.1D5@118.268,74.155 ; v1(127.59,79.674) 127.643,79.674 127.931,79.387 U1.D1@129.024,79.387 ; v1(127.711,68.193) 127.711,69.291 128.057,69.637 U1.W1@129.024,69.637 ; v1(127.969,75.515) 127.983,75.501 129.01,75.501 U1.K1@129.024,75.487 ; v1(127.998,72.246) 128.002,72.241 129.019,72.241 U1.R1@129.024,72.237 ; v1(128.224,76.791) 128.226,76.789 129.022,76.789 U1.H1@129.024,76.787 ; v1(128.466,73.285) 128.504,73.323 128.784,73.323 128.997,73.537 U1.N1@129.024,73.537 ; v1(130.248,70.782) 130.301,70.782 130.437,70.918 130.605,70.918 U1.U3@130.624,70.937 ; v1(130.299,80.894) 130.337,80.856 130.428,80.856 130.597,80.687 U1.B3@130.624,80.687 ; v1@130.304,75.712 130.318,75.712 130.525,75.505 130.605,75.505 U1.K3@130.624,75.487 ; v1@130.345,78.285 130.355,78.275 130.409,78.275 130.597,78.087 U1.F3@130.624,78.087 ; v1@130.347,68.108 130.432,68.192 130.453,68.192 130.597,68.337 U1.AA3@130.624,68.337 ; v1(130.395,73.496) 130.417,73.518 130.605,73.518 U1.N3@130.624,73.537 ; U1.AB4@131.424,67.687 131.442,67.668 131.637,67.668 131.694,67.611 v1(131.747,67.611) ; U1.A4@131.424,81.337 131.424,82.644 131.549,82.77 v1(131.549,83.404) ; U1.AA5@132.224,68.337 132.25,68.337 132.484,68.571 132.562,68.571 132.6,68.609 ; U1.W5@132.224,69.637 132.242,69.618 132.599,69.618 132.755,69.462 v1@132.769,69.462 ; U1.U5@132.224,70.937 132.242,70.918 132.371,70.918 132.719,70.57 132.721,70.572 132.88,70.572 v1@132.889,70.581 ; U1.R5@132.224,72.237 132.242,72.218 132.503,72.218 132.838,71.883 v1(132.843,71.883) ; U1.H5@132.224,76.787 132.224,76.804 132.666,77.246 v1(132.666,77.264) ; U1.F5@132.224,78.087 132.242,78.105 132.447,78.105 132.604,78.263 v1(132.658,78.263) ; U1.D5@132.224,79.387 132.226,79.384 132.661,79.384 v1(132.664,79.381) ; U1.B5@132.224,80.687 132.759,80.687 v1(133.215,81.143) ; v1(133.714,68.197) 133.767,68.197 133.907,68.337 U1.AA8@134.624,68.337 ; v1(133.731,70.691) 133.784,70.691 134.03,70.937 U1.U8@134.624,70.937 ; v1(133.851,71.868) 133.889,71.906 134.293,71.906 U1.R8@134.624,72.237 ; v1(133.884,78.357) 133.937,78.357 134.189,78.105 134.605,78.105 U1.F8@134.624,78.087 ; v1(133.925,77.264) 133.979,77.264 134.304,76.939 134.446,76.939 134.597,76.787 U1.H8@134.624,76.787 ; v1@134.035,69.676 134.151,69.676 134.172,69.654 134.606,69.654 U1.W8@134.624,69.637 ; v1(134.27,80.824) 134.324,80.824 134.443,80.705 134.605,80.705 U1.B8@134.624,80.687 ; v1(134.375,79.484) 134.428,79.484 134.507,79.405 134.605,79.405 U1.D8@134.624,79.387 ; U1.AB9@135.424,67.687 135.424,67.661 135.661,67.423 135.661,67.315 v1(135.699,67.278) ; U1.A9@135.424,81.337 135.424,82.669 135.678,82.923 136.077,82.923 136.402,83.248 v1(136.455,83.248) ; v1(135.89,75.692) 135.9,75.682 136.002,75.682 136.198,75.487 U1.K10@136.224,75.487 ; U1.AA10@136.224,68.337 136.242,68.318 136.428,68.318 136.537,68.209 v1(136.591,68.209) ; U1.U10@136.224,70.937 136.242,70.918 136.549,70.918 v1(136.574,70.893) ; U1.N10@136.224,73.537 136.25,73.537 136.437,73.35 136.536,73.35 v1@136.545,73.34 ; U1.F10@136.224,78.087 136.224,78.091 136.386,78.253 v1(136.386,78.258) ; U1.B10@136.224,80.687 136.25,80.687 136.406,80.843 136.471,80.843 v1(136.509,80.881) ; U1.R12@137.824,72.237 137.85,72.237 137.944,72.331 138.005,72.331 138.241,72.567 138.241,73.16 138.176,73.226 v1(138.176,73.279) 138.063,73.392 137.994,73.392 137.85,73.537 U1.N12@137.824,73.537 ; U1.K12@137.824,75.487 138.296,75.959 v1(138.296,77.128) 138.243,77.128 138.046,76.931 137.994,76.931 137.85,76.787 U1.H12@137.837,76.787 ; U1.D12@137.824,79.387 137.824,79.389 138.049,79.614 v1(138.049,79.617) ; U2.1D8@116.917,72.751 117.835,73.669 117.835,73.674 118.185,74.024 118.185,74.155 U2.1D5@118.268,74.155
  Top Layer 1 w0.254: U1.W12@137.824,69.637 137.836,69.637 138.191,69.282 v1(138.243,69.282)
  Bottom Layer 1 w0.203: v1(79.727,54.466) 79.764,54.504 79.764,54.966 79.78,54.982 79.78,55.341 79.942,55.503 U20.26@79.942,56.058 ; v1(115.998,72.751) 115.998,72.705 C185.2@116.45,72.252 ; v1(116.917,73.67) 116.917,73.617 116.977,73.556 116.977,72.83 C186.2@116.993,72.814 ; C183.2@117.11,75.695 117.198,75.783 117.436,75.783 117.525,75.695 117.689,75.695 117.891,75.493 117.976,75.493 C187.2@117.992,75.509 ; C32.2@131.999,81.083 133.147,81.083 133.207,81.143 v1(133.215,81.143) ; C12.2@135.472,83.55 135.472,83.416 135.641,83.248 v1(136.455,83.248) ; C1.2@135.474,65.865 135.699,66.09 v1(135.699,67.278) ; v1(138.049,79.617) 138.622,79.617 138.664,79.658 C40.2@139.481,79.658 ; v1(138.176,73.279) 138.186,73.289 139.741,73.289 C7.2@139.753,73.301
  Bottom Layer 1 w0.508: C2.2@131.54,83.371 C2.2@131.54,83.394 ; v1(131.549,83.404) C2.2@131.54,83.394 ; C12.2@135.472,83.459 135.472,83.55 135.472,83.584 135.456,83.6 135.221,83.6 134.438,84.382 134.212,84.382 134.196,84.398 R61.2@134.196,84.411 R62.2@133.144,84.411 133.144,84.398 133.128,84.382 132.601,84.382 131.613,83.394 C2.2@131.54,83.394
  other v1: 79.704,50.546 139.573,67.564 130.206,68.017 132.553,68.376 132.88,69.586 134.084,69.699 132.973,70.569 136.545,73.399 139.626,75.517 130.312,75.723 130.23,78.293 120.142,83.058 119.507,83.566 120.142,83.566 120.813,83.567 119.837,84.512 118.999,84.582 119.427,84.581 119.55,84.92
VCCA1V8_IMAGE: C75.1 C207.2 C208.2 C209.2 C213.2 C214.2 C215.2 C216.2 U2.1G17 U2.1P9 U2.1P13 U2.1R10 U20.6 | length 52.7
  SIG w0.508: v1(109.956,74.988) 109.982,75.014 109.982,75.928 v1(110.942,76.887)
  VCC w0.254: 108.237,69.248 108.323,69.248 108.44,69.131 109.39,69.131 109.474,69.215 110.236,69.215 110.58,69.559 110.952,69.559 111.385,69.993 112.23,69.993 112.489,69.734 113.442,69.734 113.6,69.892 114.446,69.892 114.457,69.903 114.754,69.903 115.005,70.155 115.005,70.568 114.813,70.761 114.113,70.761 114.088,70.736 113.388,70.736 113.136,70.988 113.136,71.831 112.425,72.542 112.425,73.178 111.589,74.014 111.589,74.309 110.909,74.988 v1(109.956,74.988)
  VCC w0.508: v1(87.15,64.304) 87.057,64.212 87.057,63.417 87.355,63.119 87.884,63.119 88.541,63.776 92.307,63.776 92.329,63.754 98.007,63.754 103.849,69.596 104.394,69.596 104.742,69.248 108.237,69.248
  Bottom Layer 1 w0.203: U20.6@83.36,60.784 84.866,60.784 84.985,60.903 84.985,62.083 85.055,62.154 ; C216.2@110.323,77.636 110.339,77.651 110.485,77.651 C214.2@111.087,77.05 ; C208.2@110.437,76.346 110.437,76.373 111.087,77.023 C214.2@111.087,77.05 ; v1(111.897,76.819) 111.939,76.862 C213.2@111.939,76.865 111.924,76.85 111.838,76.85 111.698,76.99 111.263,76.99 111.188,77.066 111.102,77.066 C214.2@111.087,77.05
  Bottom Layer 1 w0.508: 85.055,62.154 85.574,62.154 86.944,63.524 86.944,64.344 86.96,64.36 87.093,64.36 v1(87.15,64.304)
  other v1: 111.401,69.993
VCCA1V8_PMU: C74.1 C224.2 C225.2 R63.2 U2.1N18 U20.5 | length 4.3
  Top Layer 1 w0.508: C224.2@83.304,58.826 83.307,58.828 83.307,59.732 83.432,59.732 83.45,59.75 83.45,60.258 83.945,60.753 83.968,60.753 84.034,60.819 84.045,60.819 84.498,61.272 v1(84.498,61.294)
  Bottom Layer 1 w0.203: U20.5@83.36,61.134 83.369,61.125 84.276,61.125 84.445,61.294 v1(84.498,61.294)
  other v1: 108.077,72.314 137.625,84.155
VCCA_1V8: C71.1 C197.1 C199.1 C205.2 C228.2 C229.2 C234.2 R106.1 R115.2 U2.1D15 U2.1D16 U2.1H4 U2.1H16 U2.1J3 U2.1K17 U20.3 | length 149.7
  Top Layer 1 w0.178: U2.1D16@113.236,69.075 113.244,69.083 113.538,69.083 113.608,69.154 v1(113.668,69.154) 113.688,69.173 113.688,69.527 U2.1D15@113.696,69.535
  Top Layer 1 w0.203: v1(142.216,95.887) 149.094,95.887 149.131,95.85 149.144,95.85 149.312,95.682 R106.1@149.312,95.669
  Top Layer 1 w0.508: v1(87.352,65.724) 87.545,65.724 87.884,66.062 87.884,69.977 87.937,70.03 v1(87.937,70.066)
  SIG w0.178: v1(111.405,70.846) 111.833,70.846 112.263,70.415 ; 113.241,69.073 113.241,69.338 113.195,69.385 113.195,69.525 112.534,70.185 112.493,70.185 112.263,70.415 ; 113.246,69.576 v1(113.668,69.154) ; v1(117.04,76.503) 117.04,76.5 118.632,74.908 118.632,74.087 118.145,73.601 117.763,73.601 116.063,71.9 113.749,71.9 112.263,70.415
  SIG w0.203: v1(116.917,77.347) 116.931,77.347 117.184,77.093 117.511,77.093 118.505,78.087 118.505,79.262 118.538,79.295 118.538,79.8 118.953,80.215 118.953,80.345 123.664,85.056 131.064,85.056 131.117,85.003 v1(138.531,85.003) ; v1@129.937,64.497 130.264,64.169 v1(134.476,64.169)
  SIG w0.508: v1(99.368,74.898) 99.199,74.729 99.199,71.146 99.441,70.904 99.441,67.183 100.489,66.135 102.965,66.135 105.309,68.479 105.309,69.969 105.193,70.086 ; v1(105.046,70.232) 105.193,70.086 ; v1(109.772,71.506) 109.772,71.509 107.931,71.509 106.655,70.232 105.339,70.232 105.193,70.086
  VCC w0.508: v1(87.937,70.066) 87.937,69.966 88.272,69.631 94.79,69.631 95.324,70.166 96.304,70.166 99.199,73.06 99.199,74.729 v1(99.368,74.898)
  Bottom Layer 1 w0.178: U20.3@83.679,61.868 83.73,61.918 84.191,61.918 84.958,62.685 84.958,62.764 ; 110.46,70.485 110.52,70.485 110.927,70.892 111.404,70.892 C199.1@111.419,70.876 111.419,70.86 v1(111.405,70.846)
  Bottom Layer 1 w0.203: C229.2@109.516,71.162 109.516,71.206 109.772,71.462 v1(109.772,71.506) ; v1@109.815,71.448 v1@109.828,71.448 ; v1@109.858,71.419 109.858,71.368 110.038,71.188 110.038,70.946 110.111,70.873 110.111,70.72 110.346,70.485 110.46,70.485 ; v1(116.917,77.347) 117.373,76.889 117.373,76.852 117.04,76.518 v1(117.04,76.503) ; C234.2@117.388,76.889 C234.2@117.396,76.889 ; R115.2@129.846,63.881 129.846,64.441 v1(129.921,64.516) ; v1(134.476,64.169) 140.758,64.169 142.113,65.524 142.113,81.026 ; v1(138.531,85.003) 138.541,84.993 138.541,84.598 142.113,81.026 ; v1(142.216,95.887) 142.216,81.129 142.113,81.026
  Bottom Layer 1 w0.508: 84.958,62.764 85.224,62.764 86.216,63.756 86.216,64.659 86.69,65.134 86.69,65.367 87.047,65.724 v1(87.352,65.724)
VCCIO6: C238.1 R107.2 U2.1L4 U2.1L5 | length 2.3
  Top Layer 1 w0.203: U2.1L5@115.078,77.347 v1(115.538,77.806)
  Bottom Layer 1 w0.508: v1(115.538,77.806) 115.585,77.806 116.002,78.224 116.002,78.288 116.497,78.783 116.497,79.022 R107.2@116.506,79.031
VCCIO_ACODEC: C102.1 C193.2 R123.1 U2.1D13 U20.28 | length 70.9
  Top Layer 1 w0.203: 78.638,55.402 78.732,55.308 79.034,55.308 v1(79.072,55.27)
  Top Layer 1 w0.508: 78.638,55.402 78.944,55.707 79.625,55.707 80.505,54.827 81.633,54.827 81.958,55.153 81.958,55.613 81.783,55.789 81.783,55.987 81.426,56.344 81.426,56.469 C102.1@81.41,56.485
  VCC w0.203: v1(69.569,53.119) 74.208,53.119 74.721,52.606 79.279,52.606 79.547,52.874 79.547,53.253 79.279,53.52 79.173,53.52 78.768,53.926 78.768,54.717 78.801,54.75 78.801,55.005 ; v1(79.072,55.27) 79.067,55.27 78.801,55.005 ; 96.221,67.961 96.142,67.961 95.716,67.534 95.348,67.534 95.345,67.532 95,67.532 94.764,67.767 84.94,67.767 82.093,64.92 82.093,64.858 81.456,64.221 81.456,58.526 81.204,58.274 81.204,57.718 78.801,55.316 78.801,55.005 ; 100.327,71.699 100.881,71.699 102.013,72.831 103.034,72.831 103.494,72.37 104.254,72.37 104.49,72.607 104.49,72.744 104.794,73.048 105.128,73.048 105.136,73.039 105.507,73.039 105.931,73.464 106.122,73.464 106.441,73.782 107.536,73.782 108,73.318 108.265,73.318 108.623,72.96 108.705,72.96 108.986,72.679 108.986,72.283 109.038,72.232 109.038,71.748 109.157,71.629 109.325,71.629 109.605,71.909 109.939,71.909 110.175,71.673 110.175,71.647 110.294,71.528 110.565,71.528 110.845,71.249 111.572,71.249 111.808,71.013 111.808,70.882 112.626,70.064 113.158,70.064 113.317,70.223 113.616,70.223 113.725,70.332 v1(114.577,70.332)
  VCC w0.381: 96.221,67.961 96.667,67.961 96.816,68.11
  VCC w0.762: 96.816,68.189 100.327,71.699
  Bottom Layer 1 w0.203: v1(79.072,55.27) 79.11,55.308 79.11,55.513 79.17,55.574 79.17,55.594 79.252,55.676 U20.28@79.252,56.327
VCCIO_FLASH: C160.2 C161.2 C162.2 C163.2 C164.2 C174.2 C195.2 R64.2 R65.2 R86.2 R88.2 R114.1 U2.1C13 U3.C6 U3.M4 U3.N4 U3.P3 U3.P5 | length 12.4
  Top Layer 1 w0.203: C160.2@116.737,57.855 116.864,57.727 v1(117.165,57.727) ; C161.2@117.944,61.917 117.944,60.784 v1(117.954,60.773) ; R64.2@118.911,58.881 118.914,58.878 119.624,58.878 v1(119.627,58.875)
  SIG w0.203: v1(115.157,69.701) 115.104,69.701 114.888,69.917 114.468,69.917 114.231,69.681 114.231,69.284 115.062,68.453 115.062,67.826 115.24,67.648 115.24,67.23 116.44,66.03 117.04,66.03 v1(118.352,64.717)
  Bottom Layer 1 w0.203: v1@115.592,63.275 115.595,63.275 115.691,63.179 U3.P3@115.704,63.179 ; v1(115.667,63.294) 115.747,63.294 115.961,63.507 116.457,63.507 116.614,63.35 116.62,63.35 116.641,63.33 116.641,63.255 116.704,63.191 U3.P5@116.704,63.179 ; v1(116.159,62.32) 116.195,62.356 116.195,62.67 U3.N4@116.204,62.679 ; v1@116.584,63.35 v1(116.584,63.467)
  other v1: 118.954,58.024 117.11,59.929 122.387,62.672 122.832,63.07 122.428,63.119 122.13,63.369
VCCIO_SD: C108.1 C194.2 U2.1F17 U20.29 | length 67.1
  Top Layer 1 w0.203: C108.1@78.518,54.019 78.518,53.894 79.052,53.36 79.052,53.101 v1(79.09,53.063)
  VCC w0.508: v1(79.09,53.063) 75.08,53.063 72.263,55.88 72.263,65.277 75.317,68.331 84.45,68.331 84.536,68.245 94.914,68.245 v1(94.994,68.165)
  Bottom Layer 1 w0.203: U20.29@78.902,56.327 78.876,56.3 78.876,55.71 78.688,55.522 78.688,55.456 78.529,55.298 78.529,54.318 78.471,54.26 78.471,53.281 78.651,53.101 79.052,53.101 v1(79.09,53.063) ; v1(94.994,68.165) 94.956,68.127 94.956,67.759 94.755,67.558 94.755,67.314 96.431,65.638 106.151,65.638 108.125,67.612 109.014,67.612 110.49,69.088 111.006,69.088 111.221,69.302 111.389,69.302 111.398,69.294 111.79,69.294 v1(111.827,69.256) 111.827,69.309 111.891,69.373 111.891,69.501 C194.2@111.907,69.517
VCCIO_WL: C49.2 C50.2 C125.2 C192.2 R44.2 R59.2 R60.2 U2.1E16 U12.22 | length 66.8
  Top Layer 1 w0.508: v1(75.69,67.775) v1@75.707,67.792 ; v1(75.801,65.77) 75.801,66.802 75.69,66.914 75.69,67.81 77.462,67.81 78.177,68.525 R44.2@78.177,71.702 78.19,71.702 78.206,71.686 78.206,71.673 R44.2@78.232,71.647 ; U12.22@81.726,82.405 C50.2@84.816,82.406 ; C50.2@84.816,82.406 84.82,82.406 84.836,82.39 v1(84.836,80.772)
  SIG w0.508: v1(100.861,72.505) 100.861,72.343 v1(104.197,69.007)
  VCC w0.203: v1(104.197,69.007) 104.251,69.007 104.467,68.791 110.279,68.791 110.545,69.057 110.986,69.057 111.262,69.333 111.334,69.333 111.66,69.659 112.049,69.659 112.365,69.343 112.766,69.343 v1(112.804,69.306)
  VCC w0.508: v1(84.836,80.772) 84.836,78.597 83.911,77.672 81.166,77.672 79.883,76.389 79.883,73.466 78.192,71.776 v1(78.192,71.699) 78.192,69.816 78.653,69.356 87.237,69.356 87.632,68.961 95.886,68.961 96.062,69.137 96.217,69.137
  VCC w0.762: 96.217,69.137 96.543,69.137 99.969,72.563 100.803,72.563 v1(100.861,72.505)
  other v1: 75.649,66.802